# Altium PCB Audio_module.PcbDoc
Units mm, origin at the board's own origin, x right, y up, seen from the top; angles counter-clockwise.
Board outline 23.5 x 15 mm, 2 copper layers (Top Layer, Bottom Layer); 30 components, 28 nets, 127 pads, 29 vias.
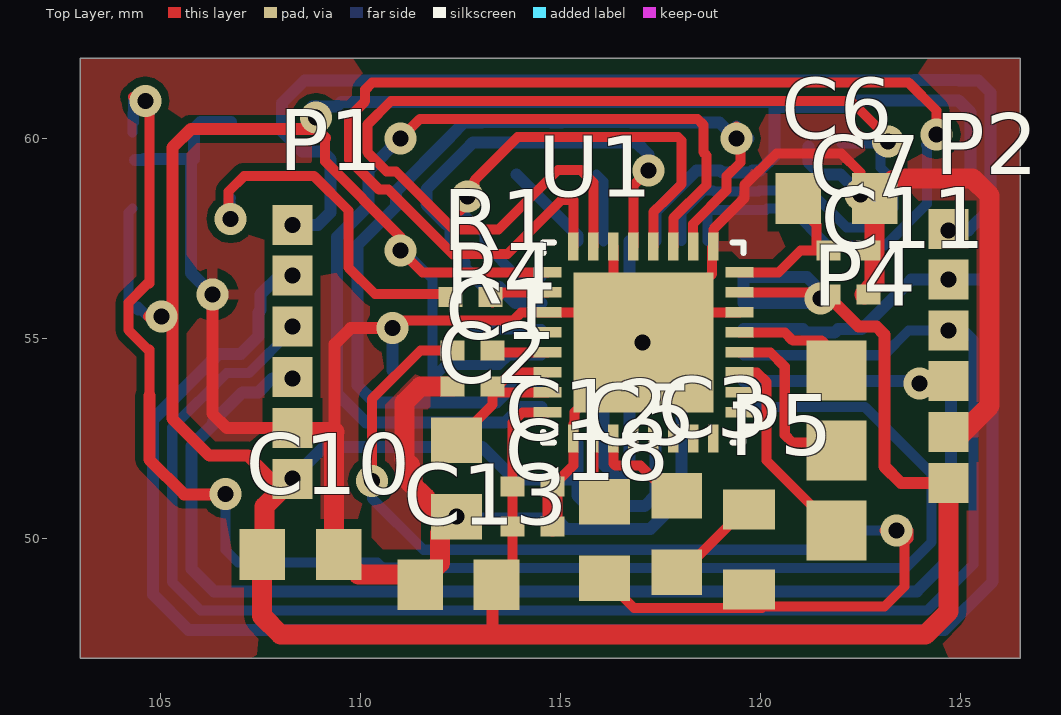
[diagram p0: Top Layer view]
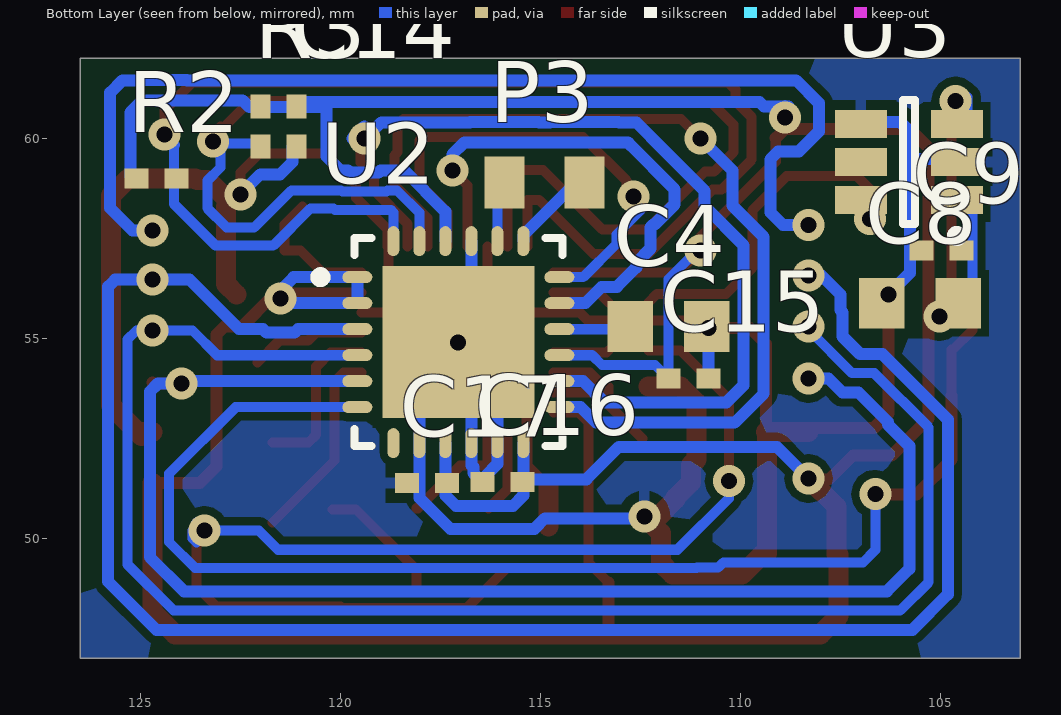
[diagram p1: Bottom Layer view, seen from below]

## Layer stack, top to bottom
Top Layer: signal copper 0.0356
Dielectric: dielectric 0.32, FR-4, Dk 4.8
Bottom Layer: signal copper 0.0356

## Board outline
103,62 126.5,62 126.5,47 103,47

## Design rules (kind name [scope] priority, off if disabled: settings)
Clearance [All] p1: gap=0.203
HoleSize [All] p1: absolutevalues=TRUE maxlimit=5 minlimit=0.3 maxpercent=80.000 minpercent=20.000
MinimumSolderMaskSliver [All] p1: minsoldermaskwidth=0
PlaneConnect [All] p1: planeconnectstyle=Direct reliefexpansion=0.508 reliefentries=4 reliefconductorwidth=0.254 reliefairgap=0.254
PolygonConnect [All] p1: connectstyle=Relief reliefconductorwidth=0.254 reliefentries=4 polygonreliefangle="90 Angle" airgapwidth=0.254
RoutingVias [All] p1: holewidth=0.8 width=0.4 viastyle="Through Hole" minholewidth=0.4 minwidth=0.8 maxholewidth=1.5 maxwidth=2
SilkToSilkClearance [All] p1: silktosilkclearance=0
SilkToSolderMaskClearance [IsPad] p1: minsilkscreentomaskgap=0 clearancetoexposedcopper=TRUE
SolderMaskExpansion [All] p1: expansion=0.051
Width [All] p1: maxlimit=2 minlimit=0.203 preferedwidth=0.762
23 further rules are at their usual default settings.

## Components (designator, comment, footprint, x,y, rotation, side; value= is the part's Value field where it differs from the comment)
C1 "Cap Semi" 0402 112.8,53.8 r0 top
C2 "10u" 0805 112.4,51.5 r90 top
C3 "10u" 0805 117.907,50.114 r270 top
C4 "10u" 0805 111.8,55.3 r0 bottom
C5 "10u" 0805 116.103,49.962 r270 top
C6 "10u" 0805 121.9,58.5 r180 top
C7 "Cap Semi" 0402 122.2,57.2 r180 top
C8 "10u" 0805 105.512,55.88 r180 bottom
C9 "Cap Semi" 0402 104.978,57.201 r180 bottom
C10 "10u" 0805 108.5,49.6 r180 top
C11 "Cap Semi" 0402 122.2,56.1 r180 top
C12 "Cap Semi" 0402 114.3,51.3 r180 top
C13 "10u" 0805 112.446,48.844 r0 top
C14 "Cap Semi" 0402 121.1,60.3 r90 bottom
C15 "Cap Semi" 0402 111.3,54 r0 bottom
C16 "Cap Semi" 0402 115.951,51.41 r180 bottom
C17 "Cap Semi" 0402 117.831,51.384 r180 bottom
C18 "Cap Semi" 0402 114.3,50.3 r180 top
P1 "InputConn" Goldpin6_1.27mm 108.3,55.3 r0 top
P2 "OutputConn" Goldpin6_1.27mm 124.7,55.2 r0 top
P3 "Programming" GeckoProgramming 115.9,58.9 r180 bottom
P4 "Headphone" 3pinConnector 121.9,54.2 r0 top
P5 "Microphone" GeckoProgramming 119.71,48.717 r90 top
R1 "Res2" 0402 112.751,56.032 r180 top
R2 "Res2" 0402 124.6,59 r0 bottom
R3 "Res2" 0402 121.996,60.3 r90 bottom
R4 "Res2" 0402 112.8,54.7 r180 top
U1 "ADAU1761" QFN32 117.2,54.9 r0 top
U2 "EFM32ZG110" QFN24_5x5_0.65 117,54.9 r180 bottom
U3 "LTC6905" SOT23-6_M 105.791,59.411 r0 bottom

## Footprints (in the part's own frame and the unit in brackets; to place one, negate y for a bottom-side part, rotate by r counter-clockwise, add the part's x,y. Pads: shape width x height; smd on the part's side, far side on the other; paste and mask are expansions set on the pad)
3pinConnector [mm]
  rect 1.5x1.5 smd: 1(0,0) 2(0,-2) 3(0,-4)
0402 [mm] "Chip Capacitor, Body 1.0x0.5mm, IPC High Density"
  rect 0.6x0.5 smd: 1(-0.5,0) 2(0.5,0)
  body extent -0.55,-0.3 0.55,0.3, height 1.3
0805 [mm]
  rect 1.14x1.27 smd: 1(-0.955,0) 2(0.955,0)
GeckoProgramming [mm]
  rect 1x1.3 smd: 1(0,0) 2(2,0)
Goldpin6_1.27mm [mm]
  rect 1x1 smd: 1(0,-3.81) 2(0,-2.54) 3(0,-1.27) 4(0,0) 5(0,1.27) 6(0,2.54)
QFN24_5x5_0.65 [mm]
  oval 0.75x0.3 smd: 1(-2.575,1.631) 2(-2.575,0.981) 3(-2.575,0.331) 4(-2.575,-0.319) 5(-2.575,-0.969) 6(-2.575,-1.619) 13(2.475,-1.619) 14(2.475,-0.969) 15(2.475,-0.319) 16(2.475,0.331) 17(2.475,0.981) 18(2.475,1.631)
  oval 0.3x0.75 smd: 7(-1.675,-2.519) 8(-1.025,-2.519) 9(-0.375,-2.519) 10(0.275,-2.519) 11(0.925,-2.519) 12(1.575,-2.519) 19(1.575,2.531) 20(0.925,2.531) 21(0.275,2.531) 22(-0.375,2.531) 23(-1.025,2.531) 24(-1.675,2.531)
  rect 3.8x3.8 smd: 25(-0.05,0.006)
  silkscreen extent -3.62,-2.59 2.55,2.61, body extent -2.63,-2.57 2.53,2.58, height 1
QFN32 [mm]
  rect 0.7x0.26 smd: 1(-2.527,1.75) 2(-2.527,1.25) 3(-2.527,0.75) 4(-2.527,0.25) 5(-2.527,-0.25) 6(-2.527,-0.75) 7(-2.527,-1.25) 8(-2.527,-1.75) 17(2.273,-1.75) 18(2.273,-1.25) 19(2.273,-0.75) 20(2.273,-0.25) 21(2.273,0.25) 22(2.273,0.75) 23(2.273,1.25) 24(2.273,1.75)
  rect 0.26x0.7 smd: 9(-1.877,-2.4) 10(-1.377,-2.4) 11(-0.877,-2.4) 12(-0.377,-2.4) 13(0.123,-2.4) 14(0.623,-2.4) 15(1.123,-2.4) 16(1.623,-2.4) 25(1.623,2.4) 26(1.123,2.4) 27(0.623,2.4) 28(0.123,2.4) 29(-0.377,2.4) 30(-0.877,2.4) 31(-1.377,2.4) 32(-1.877,2.4)
  rect 3.5x3.5 smd: 33(-0.127,0)
  silkscreen extent -2.63,-2.5 2.37,2.5
SOT23-6_M [mm] "SOT23, 6-Leads, Body 2.9x1.6mm, Pitch 0.95mm, Lead Span 2.7mm, IPC Low Density"
  rect 1.3x0.7 smd: 1(-1.2,0.95) 2(-1.2,0) 3(-1.2,-0.95) 4(1.2,-0.95) 5(1.2,0) 6(1.2,0.95)
  silkscreen extent -1.32,-1.55 0.15,1.97, body extent -0.9,-1.55 0.9,1.55, height 1.45

## Part data
C1 C7 C9 C11 C12 C14 C15 C16 C17 C18: "Capacitor (Semiconductor SIM Model)"
C2 C3 C4 C5 C6 C8 C10 C13: library part "Cap Semi", "Capacitor (Semiconductor SIM Model)"
P1 P2: library part MHDR1X6, "Header, 6-Pin"
P3 P5: library part MHDR1X2, "Header, 2-Pin"
P4: library part "Header 3", "Header, 3-Pin"
R1 R2 R3 R4: "Resistor"

## Via types
v1: diameter 0.8, hole 0.4, Top Layer to Bottom Layer, 29 vias

## Nets (pads, with @x,y where several pads share a name; then routed paths per layer and width w, separated by ;. In a path a pad name is that pad's centre, name@x,y a point inside that pad or via, vN(x,y) a via of type N, cw(c..) or ccw(c..) an arc to the next point about the centre after c; other vN are vias at no path point)
+5V: P1.6 P2.6 | length 27.1
  Top Layer w0.3: v1(124.7,57.7) P2.6
  Bottom Layer w0.3: v1(108.3,57.84) 108.94,57.84 109.253,58.153 109.253,59.479 109.057,59.675 108.536,59.675 108.037,60.175 108.037,60.882 108.608,61.453 121.496,61.453 ; 121.497,61.453 123.835,61.453 123.838,61.456 124.962,61.456 124.965,61.453 125.447,61.453 125.756,61.144 125.756,58.256 125.2,57.7 v1(124.7,57.7) v1@124.856,57.856
ADC_SDATA: U1.26 U2.14 | length 24.6
  Top Layer w0.25: U1.26@118.317,57.3 118.317,57.864 119.155,58.702 119.155,59.055 119.5,59.4 119.5,59.9 119.25,60.15 119.4,60.3 v1(119.4,60)
  Bottom Layer w0.3: U2.14 113.931,53.931 113.397,53.397 110.354,53.397 109.922,53.829 109.922,57.329 110.893,58.3 110.893,58.687 112.253,60.046 112.253,60.053 112.6,60.4 113.039,60.4 113.045,60.406 114.755,60.406 114.761,60.4 115.039,60.4 115.045,60.406 116.755,60.406 116.761,60.4 118.975,60.4 119.375,60 119.7,60 119.4,60.3 v1(119.4,60)
BCLK: U1.28 U2.18 | length 13.2
  Top Layer w0.25: v1(112.678,58.553) 112.5,58.375 112.5,58.2 112.853,58.553 112.853,58.953 113.932,60.032 117.94,60.032 118.028,59.944 118.028,58.857 117.543,58.372 117.536,58.372 117.323,58.159 U1.28
  Bottom Layer w0.25: v1(112.678,58.553) 112.5,58.375 112.5,58.2 113.1,57.6 113.1,57.362 113.931,56.531 U2.18
CLK_OE: U2.6 U3.3 | length 40.9
  Top Layer w0.25: v1(104.623,60.935) 104.419,60.935 104.318,61.036 104.521,61.036 104.724,60.833 104.724,56.378 104.686,56.378 104.201,55.893 104.201,55.207 104.686,54.722 104.724,54.722 104.724,53.576
  Top Layer w0.3: 104.724,53.576 104.724,51.968 105.593,51.1 106.624,51.1 v1(106.629,51.105)
  Bottom Layer w0.25: U3.3@104.3,60.15 104.3,60.637 104.343,60.681 104.343,60.401 104.318,60.427 104.318,61.036 104.419,60.935 v1(104.623,60.935) ; v1(106.629,51.105) 106.629,49.708 106.937,49.4 110.428,49.4 110.557,49.272 111.084,49.272 111.096,49.26 123.631,49.26 124.282,49.911 124.282,51.618 122.619,53.281 U2.6
CM: C1.2 C2.2 U1.6 U1.7 | length 4.6
  Top Layer w0.254: C2.2@112.455,52.5 113.3,53.345 C1.2 ; U1.7 113.45,53.65 C1.2 ; U1.6 113.767,54.15 113.417,53.8 C1.2
DAC_SDATA: U1.27 U2.13 | length 23.9
  Top Layer w0.25: v1(111,60) 111.485,60.485 118.427,60.485 118.572,60.34 118.572,59.657 118.65,59.579 118.65,58.838 117.823,58.011 U1.27
  Bottom Layer w0.3: v1(111,60) 110.203,59.203 110.203,58.322 109.419,57.537 109.419,53.62 110.145,52.894 113.605,52.894 113.993,53.281 U2.13
GND: C1.1 C2.1 C4.1 C6.1 C7.1 C8.1 C9.1 C10.1 C11.1 C12.1 C13.1 C14.1 C15.1 C16.1 C17.1 C18.1 P1.2 P2.2 U1.3 U1.9 U1.22 U1.25 U1.30 U1.33 U2.8 U2.10 U2.11 U2.21 U2.25 U3.2 U3.4 | length 88.9
  Top Layer w0.25: v1(110.8,55.255) 110.992,55.447 113.816,55.447 114.019,55.65 U1.3 U1.33@116.309,55.65 ; C12.1 115.323,51.823 U1.9 115.323,52.856 115.351,52.884 115.351,53.164 U1.33@117.071,54.885 ; U1.30 116.323,55.664 U1.33@116.309,55.65 ; U1.33@116.83,55.13 U1.33@116.309,55.65 ; v1(117.056,54.9) U1.33 ; U1.33@117.08,54.893 U1.33@117.837,55.65 ; U1.22 U1.33@117.837,55.65 ; v1(122.5,58.6) 122.5,59.146 122.023,59.623 120.399,59.623 119.608,58.832 119.608,58.514 118.823,57.729 U1.25 118.795,57.272 118.795,56.608 U1.33@117.837,55.65
  Top Layer w0.3: v1(106.3,56.1) 106.3,53.12 106.66,52.76 P1.2 ; 109.355,52.66 109.355,54.855 109.755,55.255 v1(110.8,55.255)
  Top Layer w0.5: P1.2@108.3,52.66 109.355,52.66 109.334,52.639 109.334,49.621 C10.1@109.355,49.6 ; C10.1 109.955,49.1 111.7,49.1 111.989,49.389 111.989,50.134 v1(112.4,50.545) 112.055,50.545 111.621,50.979 111.621,51.017 111.24,51.398 111.24,51.83 111.1,51.97 111.1,53.4 111.5,53.8 C1.1 ; C18.1 C12.1 ; C11.1@122.6,56.1 122.855,56.355 C6.1@122.855,58.3 ; C6.1 123.32,58.965 123.585,58.965 123.624,59.004 125.298,59.004 125.73,58.572 125.73,53.319 124.968,52.557 124.968,52.66 P2.2
  Bottom Layer w0.3: U3.2@104.362,59.461 104.561,59.461 104.587,59.487 105.842,59.487 105.842,60.249 106.004,60.411 U3.4@106.762,60.411 ; 105.766,59.487 105.766,56.634 v1(106.3,56.1) ; C15.1@110.8,54.2 v1(110.8,55.255) C4.1 ; v1(112.4,50.545) 112.4,50.5 114.888,50.5 115.15,50.239 117.25,50.239 118.025,51.013 U2.8 118.025,53.931 v1(117.056,54.9) ; C16.1@116.383,51.554 116.075,51.862 U2.11 116.075,53.931 U2.25@116.725,54.581 ; C16.1 116.677,51.636 116.677,51.781 116.725,51.828 U2.10 U2.25@116.725,54.581 ; U2.21 116.725,55.231 U2.25 U2.25@116.725,54.581 ; C14.1@121.2,59.8 121.2,59.405 121.505,59.1 122,59.1 v1(122.5,58.6)
LRCLK: U1.29 U2.17 | length 12.9
  Top Layer w0.25: U1.29 116.823,58.823 v1(117.2,59.2)
  Bottom Layer w0.3: U2.17 113.879,55.881 113.471,56.288 113.088,56.288 112.6,56.776 112.6,56.893 112.247,57.247 112.247,57.777 112.177,57.847 112.147,57.847 111.647,58.347 111.647,58.729 112.756,59.838 112.756,59.845 112.808,59.897 113.247,59.897 113.254,59.903 114.546,59.903 114.553,59.897 115.247,59.897 115.254,59.903 116.546,59.903 116.553,59.897 116.903,59.897 v1@117.2,59.6
MCLK: R1.1 U1.2 | length 1.5
  Top Layer w0.25: R1.1@113.3,55.9 113.55,56.15 U1.2
MICBIAS: R4.1 U1.5 | length 1.4
  Top Layer w0.254: R4.1 113.35,54.65 U1.5
MODCONND0: P1.5 P2.5 U2.3 | length 46
  Bottom Layer w0.3: v1(108.3,56.57) 107.97,56.57 107.503,56.103 107.503,55.71 107.447,55.653 107.447,55.047 107.012,54.612 106.453,54.612 104.816,52.974 104.816,48.6 105.7,47.716 124.602,47.716 125.806,48.92 125.806,56.294 125.63,56.47 v1@124.763,56.47 ; U2.3 121.062,55.231 121.147,55.147 121.853,55.147 121.938,55.231 122.531,55.231 123.77,56.47 v1(124.7,56.47)
MODCONND1: P1.4 P2.4 U2.4 | length 40.5
  Bottom Layer w0.254: v1(108.3,55.3) 108.3,55.221 107.211,54.132 106.652,54.132 105.296,52.775 105.296,48.908 106.007,48.197 124.168,48.197 125.326,49.355 125.326,54.974 125.1,55.2 v1(124.7,55.2) 123.7,55.2 123.081,54.581 U2.4
MODCONND2: P1.3 P2.3 U2.5 | length 36.1
  Top Layer w0.3: v1(123.977,53.873) 124.673,53.873 P2.3@124.7,53.9
  Bottom Layer w0.3: v1(108.3,54) 107.8,54 107.451,53.651 107.051,53.651 106.314,52.914 106.314,52.849 105.776,52.311 105.776,49.24 106.339,48.677 123.912,48.677 124.765,49.53 124.765,53.67 124.562,53.873 v1(123.977,53.873) ; U2.5 v1@123.977,53.931
NetC3_1: C3.1 U1.11 | length 2.9
  Top Layer w0.254: U1.11 116.323,51.877 116.381,51.819 117.003,51.819 118.068,50.755 C3.1@118.1,50.755
NetC3_2: C3.2 P5.2 | length 3.1
  Top Layer w0.254: C3.2@118.1,48.845 118.1,49.215 119.609,50.724 P5.2@120.2,50.724
NetC4_2: C4.2 U2.16 | length 1.8
  Bottom Layer w0.254: C4.2 112.824,55.231 U2.16
NetC5_1: C5.1 U1.10 | length 1.9
  Top Layer w0.254: U1.10 115.823,51.232 C5.1@116.3,50.755
NetC5_2: C5.2 P5.1 R4.2 | length 31.2
  Top Layer w0.254: v1(110.287,51.435) 110.287,53.487 111.5,54.7 R4.2 ; C5.2@115.9,49.2 116.84,48.26 117.134,48.26 117.135,48.259 118.679,48.259 118.68,48.26 P5.1@120.04,48.26 ; P5.1@120,48.3 123.1,48.3 123.6,48.8 123.6,49.9 123.7,50 123.7,50.2 v1@123.105,50.2 ; v1@123.105,50.2 v1(123.4,50.2)
  Bottom Layer w0.254: v1(110.287,51.435) 110.287,51.003 111.575,49.715 121.559,49.715 122.044,50.2 123.7,50.2 123.7,50 123.6,49.9 123.6,50.4 v1(123.4,50.2) ; v1@123.105,50.2 v1(123.4,50.2)
NetC6_2: C6.2 C7.2 U1.24 | length 3.4
  Top Layer w0.254: U1.24 120.45,56.65 121,57.2 121.4,57.2 121.4,57.845 C6.2@120.945,58.3
NetP3_1: P3.1 U2.20 | length 1.7
  Bottom Layer w0.254: P3.1@115.9,59.1 116.075,58.925 U2.20
NetP3_2: P3.2 U2.19 | length 2.3
  Bottom Layer w0.3: P3.2@113.9,59.1 115.425,57.575 U2.19
NetP4_1: P4.1 U1.21 | length 2.9
  Top Layer w0.254: U1.21 120.606,55.15 120.811,54.945 121.53,54.945 P4.1@122.075,54.4
NetP4_2: P4.2 U1.20 | length 4.2
  Top Layer w0.254: U1.20 120.25,54.65 120.607,54.293 120.607,52.593 120.8,52.4 P4.2@121.7,52.4
NetP4_3: P4.3 U1.19 | length 4.9
  Top Layer w0.25: U1.19 119.917,54.15 120.152,53.916 120.152,51.952 120.15,51.95 P4.3@121.7,50.4
NetR1_2: R1.2 U3.6 | length 9.1
  Top Layer w0.25: v1@106.705,57.988 106.705,58.674 107.086,59.055 108.845,59.055 109.703,58.198 109.703,56.769 110.363,56.109 112.091,56.109 R1.2@112.3,55.9
  Bottom Layer w0.25: v1(106.756,57.988) 106.756,58.404 106.705,58.454 U3.6@106.762,58.511
SCL: R2.1 U1.32 U2.24 | length 34.4
  Top Layer w0.25: U1.32 115.323,58.464 115.03,58.464 113.674,57.108 112.319,57.108 112.319,57.099 110.7,58.719 110.469,58.719 109.719,59.469 109.719,60.531 110.118,60.931 110.118,61.218 110.292,61.392 123.708,61.392 124.4,60.7 v1(124.4,60.1)
  Bottom Layer w0.25: U2.24 118.675,58.151 118.739,58.215 120.139,58.215 120.171,58.247 120.753,58.247 121.681,57.319 123.119,57.319 124.164,58.364 124.164,59.836 124.136,59.836 v1(124.4,60.1)
SDA: R3.1 U1.31 U2.23 | length 33.2
  Top Layer w0.25: U1.31 115.823,58.898 115.511,59.21 114.938,59.21 113.452,57.725 112.335,57.725 110.887,59.172 110.657,59.172 110.172,59.657 110.172,60.343 110.767,60.939 122.261,60.939 123,60.2 123,60.3 123.19,60.11 v1(123.19,59.919)
  Bottom Layer w0.25: U2.23 118.025,58.142 118.583,58.7 118.817,58.7 118.849,58.669 119.951,58.669 119.983,58.7 121.229,58.7 122.157,57.772 122.843,57.772 123.328,58.257 123.328,58.943 123,59.271 123,59.729 123.139,59.868 R3.1@122.022,59.868
VCC: C8.2 C9.2 C10.2 C11.2 C12.2 C13.2 C14.2 C15.2 C16.2 C17.2 C18.2 P1.1 P2.1 R2.2 R3.2 U1.1 U1.8 U1.23 U2.1 U2.2 U2.9 U2.12 U2.15 U2.22 U3.1 | length 116.2
  Top Layer w0.25: v1(111,57.2) 111.554,56.646 114.669,56.646 U1.1
  Top Layer w0.254: v1(105.029,55.55) 104.687,55.55 104.937,55.8 v1@105.3,55.8 ; 107.768,51.49 108.29,51.49 P1.1 ; v1@108.89,60.237 v1(108.89,60.528) ; 109.118,60.008 109.118,59.426 111,57.544 v1(111,57.2) ; C13.2@113.3,48.9 113.8,49.4 C18.2 C12.2 113.8,52.9 114.05,53.15 U1.8 ; U1.23 C11.2@121.5,56.15
  Top Layer w0.3: 107.768,51.49 107.188,52.07 106.223,52.07 105.3,52.993 105.3,55.8 105.3,59.773 105.763,60.237 v1@108.89,60.237 ; P1.1 v1(108.3,51.5) ; v1(108.89,60.528) 108.744,60.382 109.118,60.008 ; 113.3,47.523 C13.2@113.3,48.9 ; C11.2 121.7,56.051 122.447,55.303 122.896,55.303 123.103,55.096 123.103,53.304 123.1,53.301 123.1,53.1 123.103,53.096 123.103,51.797 123.51,51.39 P2.1
  Top Layer w0.5: C10.2 107.545,48.055 108.001,47.6 124.13,47.6 124.7,48.17 P2.1 ; C10.2@107.6,49.6 107.6,50.8 P1.1@108.29,51.49
  Bottom Layer w0.254: U3.1@104.3,58.25 104.2,58.15 104.2,55.937 104.437,55.7 104.437,55.8 104.687,55.55 v1(105.029,55.55) ; v1@111.087,57.2 111.8,56.487 C15.2 112.135,54.335 113.462,54.335 113.708,54.581 U2.15
  Bottom Layer w0.3: v1(108.3,51.5) 109.088,52.288 113.04,52.288 113.853,51.475 115.35,51.475 C16.2@115.425,51.4 ; v1@108.8,60.8 109.416,60.8 109.525,60.91 120.99,60.91 C14.2 ; v1(108.89,60.528) v1@108.89,60.81 ; U2.12 115.425,51.072 115.691,50.806 117.106,50.806 117.375,51.075 U2.9 ; U2.22 117.375,58.168 118.407,59.2 118.993,59.2 119.047,59.147 119.753,59.147 119.807,59.2 120,59.2 120.353,59.553 120.353,60.782 122.276,60.782 122.443,60.95 124.043,60.95 124.047,60.953 124.753,60.953 124.757,60.95 124.95,60.95 125.253,60.647 R2.2@125.253,59.053 ; U2.2 U2.1 121.169,56.531 121.6,56.1 v1(121.5,56) 121.381,55.881 U2.2
pads on no net: U1.4 U1.12 U1.13 U1.14 U1.15 U1.16 U1.17 U1.18 U2.7 U3.5

## Polygon pours and split planes (outlines as drawn)
GND on Top Layer "Top Layer-No Net" (solid, pour order 4): 103,62 126.5,62 126.5,47 103,47
GND on Bottom Layer "Top Layer-No Net" (solid, pour order 6): 103,62 126.5,62 126.5,47 103,47

## Dimensions
103,62 to 126.5,62 on Mechanical 1
126.5,62 to 126.5,47 on Mechanical 1